# Altium PCB PCB1.PcbDoc
Units mil, origin at the board's own origin, x right, y up, seen from the top; angles counter-clockwise.
Board outline 1535 x 1515 mil, 2 copper layers (Top Layer, Bottom Layer); 34 components, 52 nets, 216 pads, 17 vias.
Unrouted connection lines stored in the file: 13.
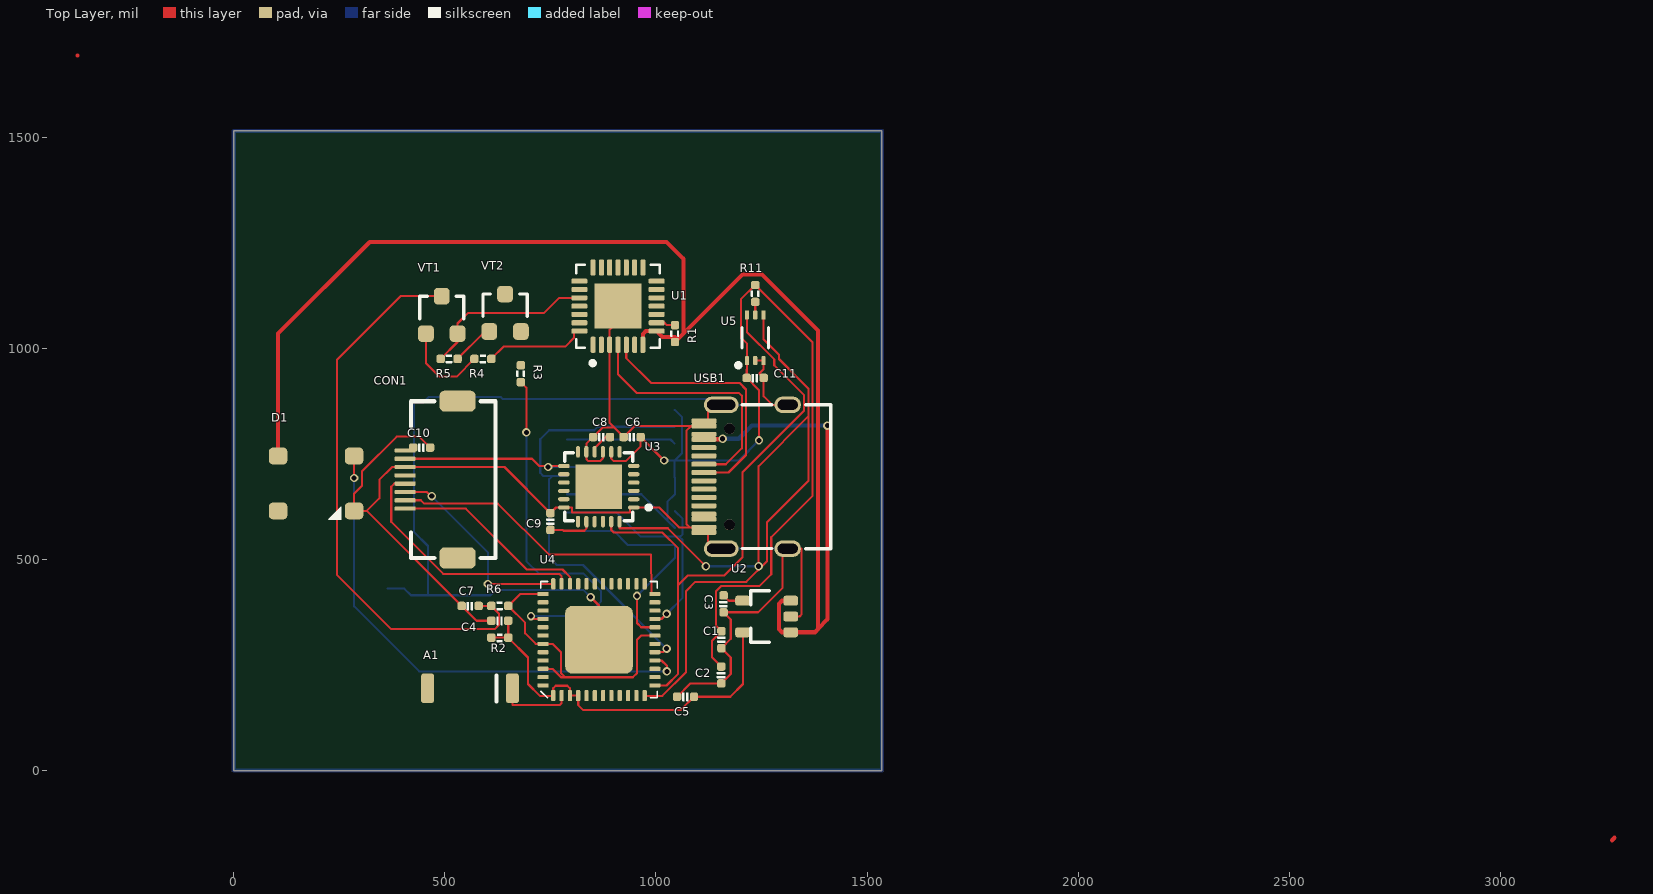
[diagram p0: Top Layer view]
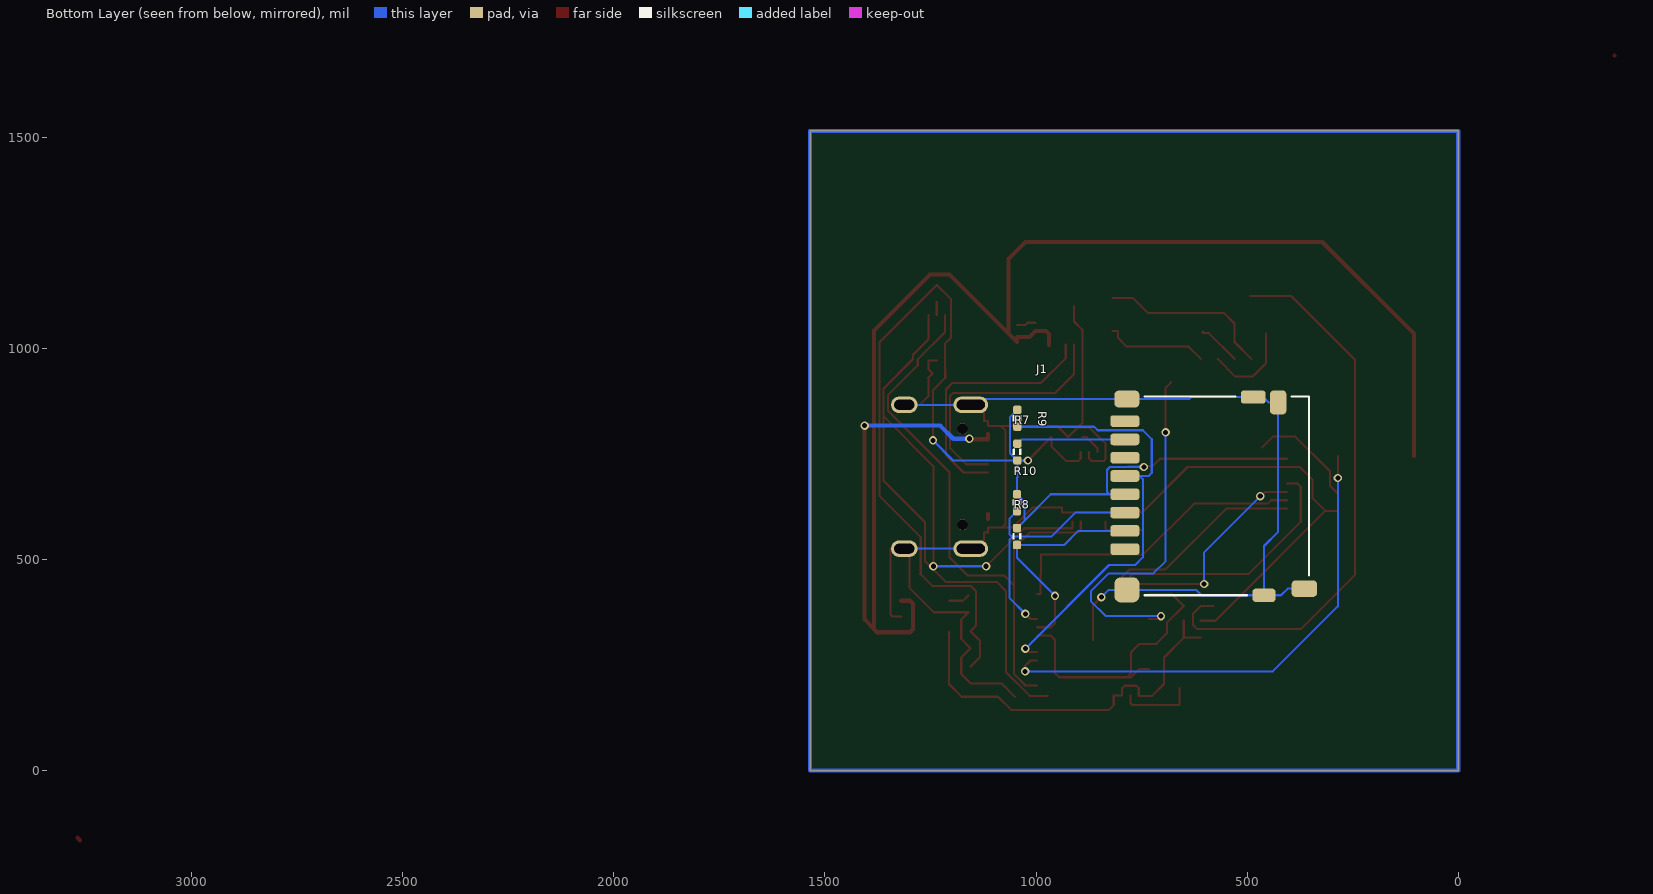
[diagram p1: Bottom Layer view, seen from below]
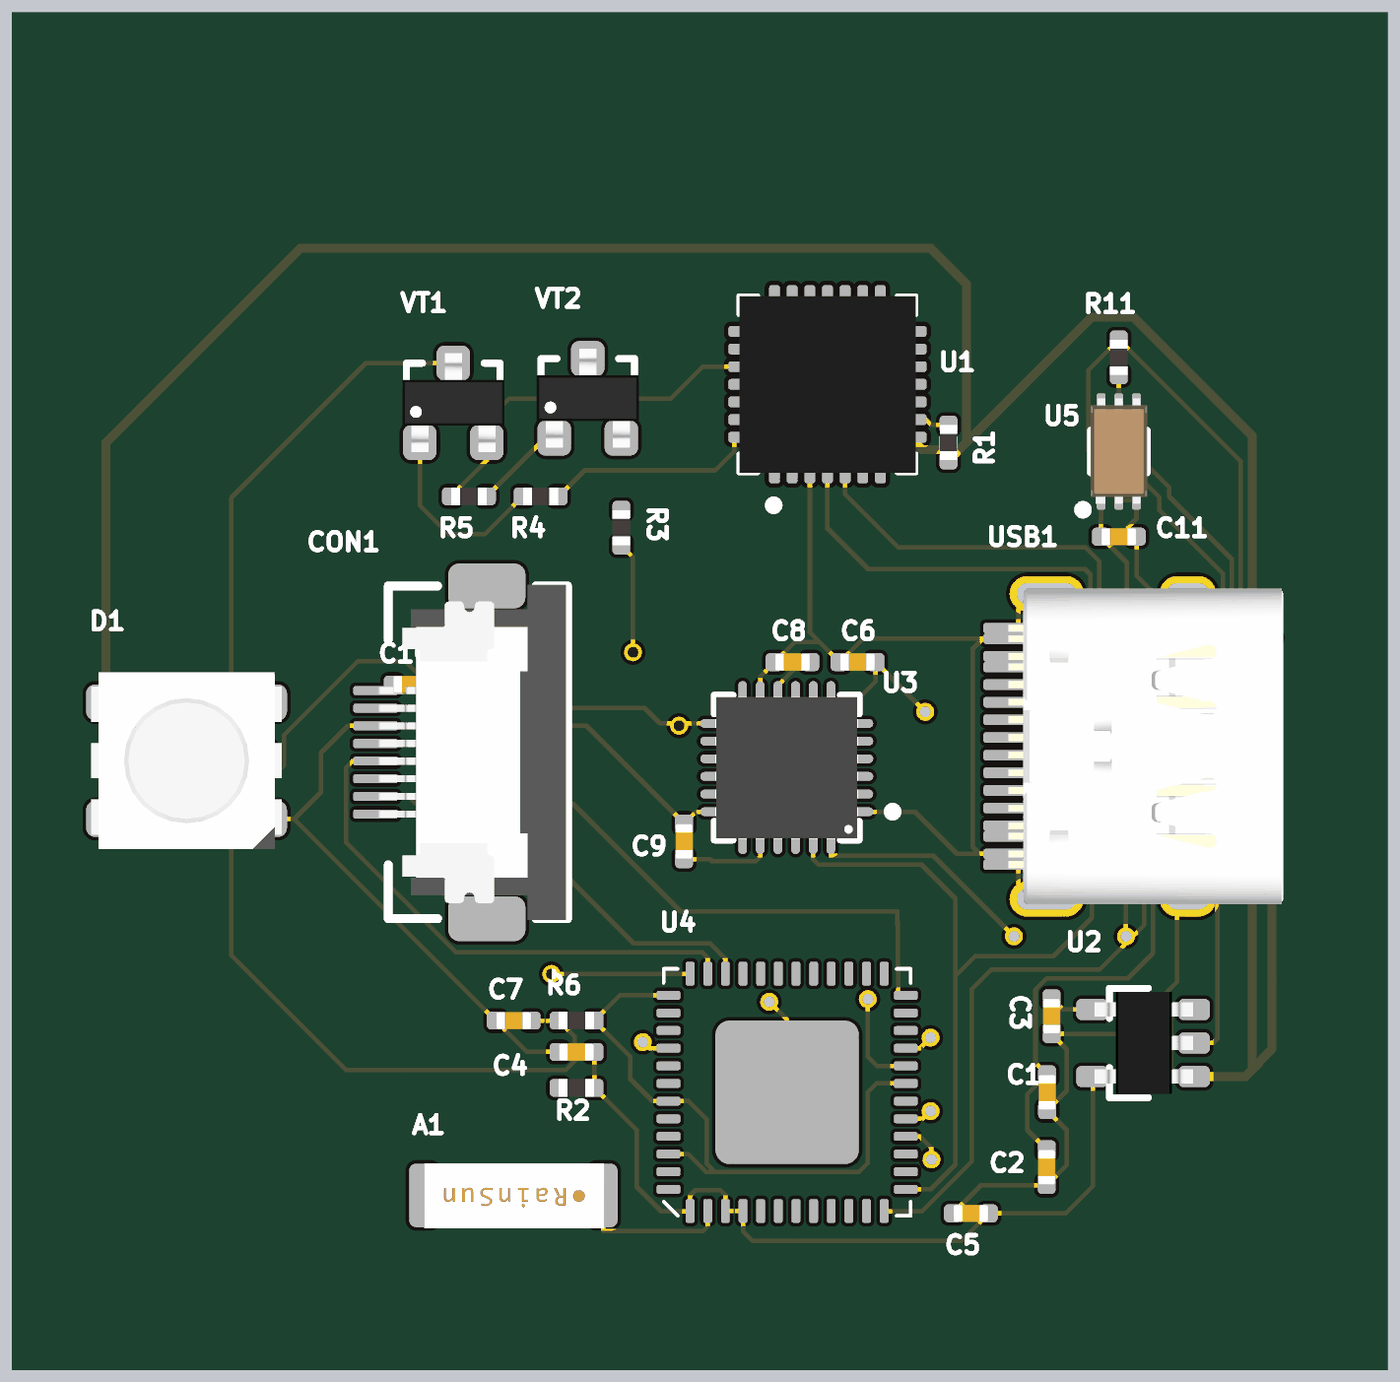
[diagram p2: 3D render of the assembled board from above, using the file's embedded part models]
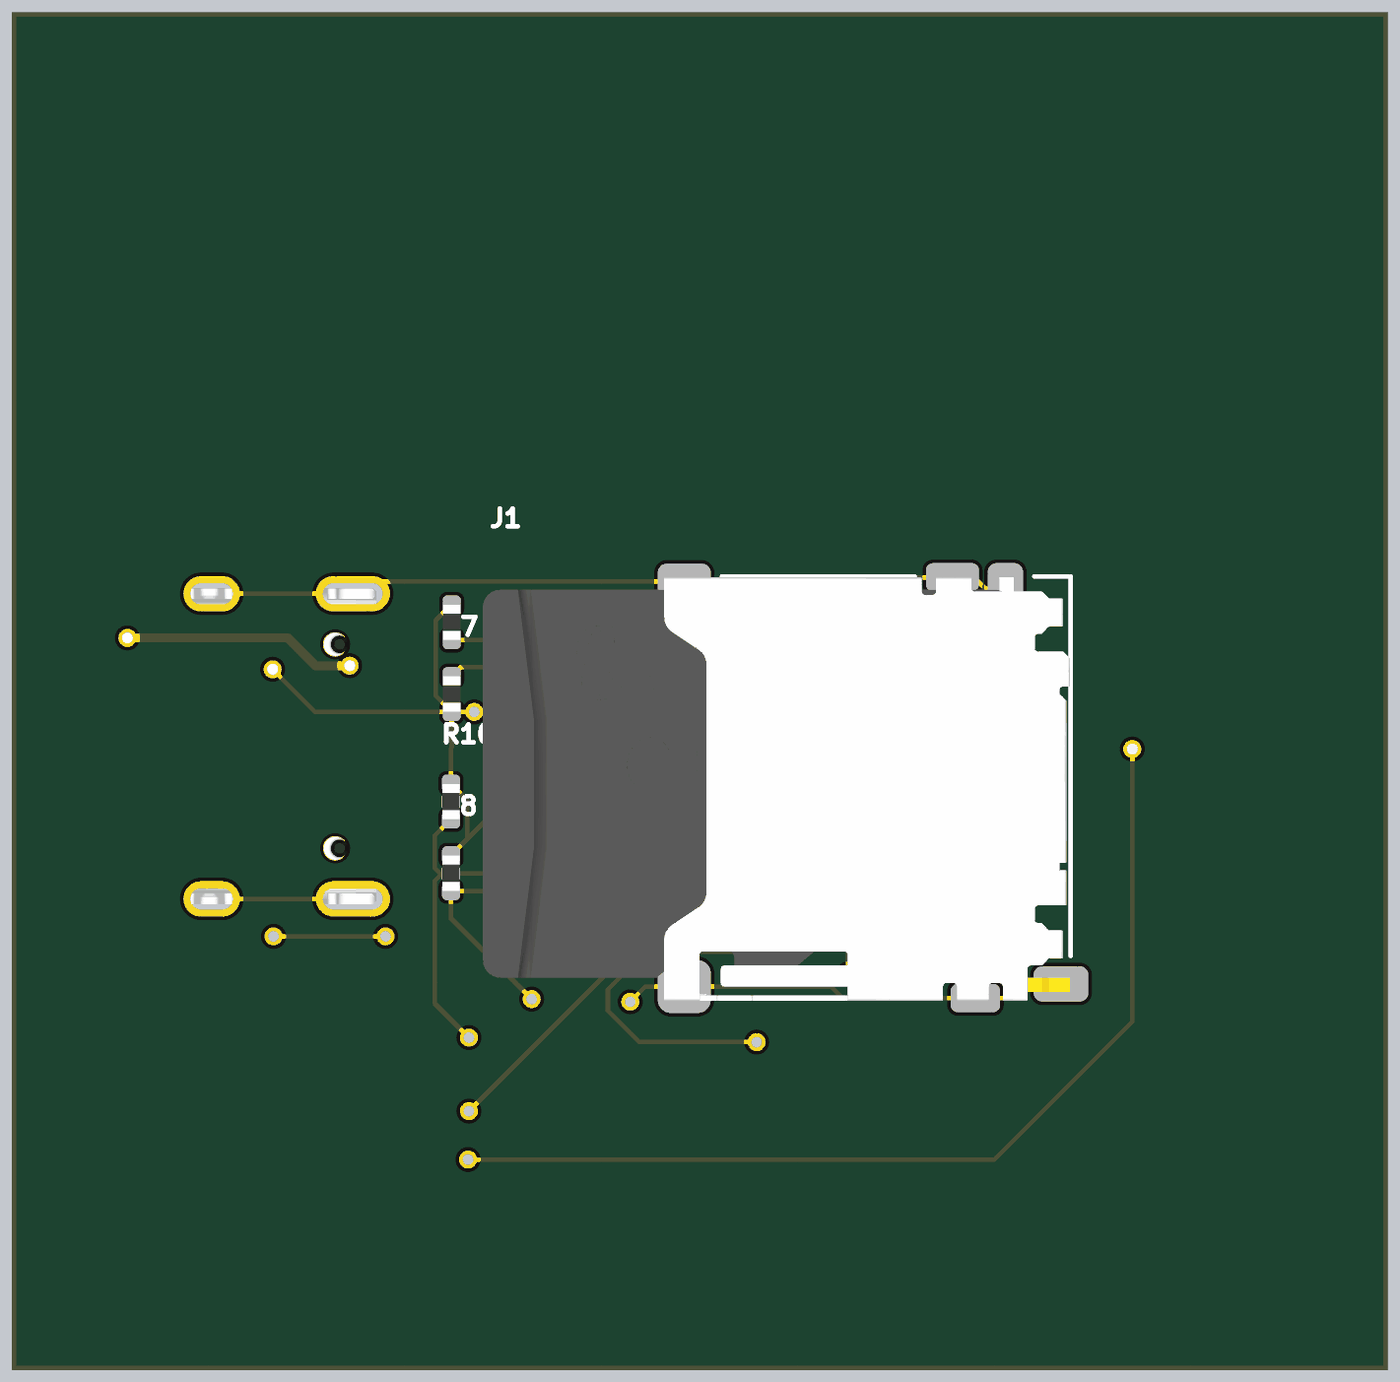
[diagram p3: 3D render of the assembled board from below, using the file's embedded part models]

## Layer stack, top to bottom
Top Solder: solder mask 0.4, Solder Resist, Dk 3.5
Top Layer: signal copper 1.4
Dielectric 1: dielectric 12.6, FR-4, Dk 4.8
Bottom Layer: signal copper 1.4
Bottom Solder: solder mask 0.4, Solder Resist, Dk 3.5

## Board outline
0,0 0,1515 1535,1515 1535,0

## Design rules (kind name [scope] priority, off if disabled: settings)
Clearance [All] p1: gap=5 ignorepadtopadclearanceinfootprint=FALSE
PolygonConnect [All] p1: connectstyle=Relief reliefconductorwidth=10 reliefentries=4 polygonreliefangle="90 Angle" airgapwidth=10
RoutingVias [All] p1: holewidth=12 width=20 viastyle="Through Hole" minholewidth=4 minwidth=12 maxholewidth=28 maxwidth=50
SolderMaskExpansion [All] p1: expansion=4 istentingtop=FALSE
Width Width_1 [InNet('VDD_5V')] p1: maxlimit=15 minlimit=10 preferedwidth=10
Width [All] p2: maxlimit=10 minlimit=5 preferedwidth=5
30 further rules are at their usual default settings.

## Components (designator, comment, footprint, x,y, rotation, side; value= is the part's Value field where it differs from the comment)
A1 "RAINSUN" ANT-Rainsun-AN5120 560,195 r180 top
C1 "0.1uF" CAP_0402 1155,310 r90 top value=0.1u
C2 "10uF" CAP_0402 1154.53,226.46 r90 top value=0.1u
C3 "10nF" CAP_0402 1160,395 r270 top value=0.1u
C4 "10uF" CAP_0402 630,355 r180 top value=0.1u
C5 "0.1uF" CAP_0402 1070,175 r180 top value=0.1u
C6 "10nF" CAP_0402 943.5,790 r180 top value=0.1u
C7 "0.1uF" CAP_0402 560,390 r180 top value=0.1u
C8 "0.1uF" CAP_0402 871,790 r0 top value=0.1u
C9 "2.2nF" CAP_0402 750,590 r90 top value=0.1u
C10 "0.1uF" CAP_0402 445,765 r0 top value=0.1u
C11 "0.1uF" CAP_0402 1235,930 r0 top value=0.1u
CON1 "FFC_0.5_8" FFC_0.5_8 495,689.37 r90 top
D1 "RGB" LED_5050_WS2812B 195,680 r0 top
J1 "TF-Socket" "TF-Card-Amphenol with TF" 789.71,654.37 r270 bottom
R1 "10K" RES_0402 1045,1035 r90 top value=22R
R2 "0R" RES_0402 630,315 r180 top value=22R
R3 "200R" RES_0402 680,940 r90 top value=22R
R4 "12K" RES_0402 590,975 r180 top value=22R
R5 "12K" RES_0402 510,975 r0 top value=22R
R6 "10K" RES_0402 630,390 r0 top value=22R
R7 "10K" RES_0402 1044.17,754.43 r270 bottom value=22R
R8 "10K" RES_0402 1045,554.43 r90 bottom value=22R
R9 "10K" RES_0402 1044.17,834.43 r90 bottom value=22R
R10 "10K" RES_0402 1045,634.43 r90 bottom value=22R
R11 "10k" RES_0402 1235,1130 r270 top value=22R
U1 "CP2102" QFN-28 910,1100 r90 top value=Value
U2 "LP2992 3V3" SOT23-5 1260,365 r180 top
U3 "MPU6050" QFN-24 864.53,672.32 r180 top
U4 "ESP32_SIP" QFN-48_7X7 865,310 r90 top
U5 "BH1750FVI-TR" BH1750FVI 1235,1025 r90 top
USB1 "Type-C" Type-C-TOP 1212.74,696.04 r0 top
VT1 "S8050" SMT_TRIODE_NPN 492.6,1079.29 r0 top
VT2 "S8050" SMT_TRIODE_NPN 642.6,1084.29 r0 top

## Footprints (in the part's own frame and the unit in brackets; to place one, negate y for a bottom-side part, rotate by r counter-clockwise, add the part's x,y. Pads: shape width x height; smd on the part's side, far side on the other; paste and mask are expansions set on the pad)
ANT-Rainsun-AN5120 [mm] "选择焊盘"
  rrect50% 0.8x1.8 smd: 1(-2.54,0) ""(2.563,0)
  silkscreen extent -1.57,-0.76 -1.57,0.79, body extent -2.57,-0.91 2.54,0.94, height 1.32
BH1750FVI [mm]
  rrect50% 0.55x0.25 smd paste+0 mask+0: 1(-1.375,0.5) 2(-1.375,0) 3(-1.375,-0.5) 4(1.375,-0.5) 5(1.375,0) 6(1.375,0.5)
  silkscreen extent -1.78,-0.8 0.6,1.14, body extent -1.49,-0.81 1.51,0.79, height 0.77
CAP_0402 [mil]
  rrect50% 20x20 smd: 1(-20,0) 2(20,0)
  silkscreen extent -7,-9 7,9, body extent -20,-10 20,10, height 20
FFC_0.5_8 [mil]
  rrect50% 50x86 smd: 0(-185.63,-35) 0(185.63,-35)
  rrect50% 10x50 smd: 1(-68.9,89) 2(-49.21,89) 3(-29.53,89) 4(-9.84,89) 5(9.84,89) 6(29.53,89) 7(49.21,89) 8(68.9,89)
  silkscreen extent -186,-125 186,75, body extent -187,-124 187,87, height 82
LED_5050_WS2812B [mil]
  rrect50% 44x40 smd: 1(-90,65) 2(-90,-65) 3(90,-65) 4(90,65)
  silkscreen extent 30,-85 60,-55, body extent -106,-98 106,98, height 69
QFN-24 [mm] "QFN, 24-Leads, Body 4.1x4.1mm (max), Pitch 0.50mm, IPC Low Density"
  oval 0.7x0.25 smd: 1(-2.1,1.25) 2(-2.1,0.75) 3(-2.1,0.25) 4(-2.1,-0.25) 5(-2.1,-0.75) 6(-2.1,-1.25) 13(2.1,-1.25) 14(2.1,-0.75) 15(2.1,-0.25) 16(2.1,0.25) 17(2.1,0.75) 18(2.1,1.25)
  oval 0.25x0.7 smd: 7(-1.25,-2.1) 8(-0.75,-2.1) 9(-0.25,-2.1) 10(0.25,-2.1) 11(0.75,-2.1) 12(1.25,-2.1) 19(1.25,2.1) 20(0.75,2.1) 21(0.25,2.1) 22(-0.25,2.1) 23(-0.75,2.1) 24(-1.25,2.1)
  rect 2.8x2.7 smd: ""(0,0)
  silkscreen extent -3.13,-2.05 2.05,2.05, body extent -2.02,-2.02 2.02,2.02, height 0.95
QFN-28 [mil]
  rrect50% 38x12 smd mask+5: 1(-91.5,59.05) 2(-91.5,39.37) 3(-91.5,19.68) 4(-91.5,0) 5(-91.5,-19.69) 6(-91.5,-39.37) 7(-91.5,-59.06) 15(91.5,-59.06) 16(91.5,-39.37) 17(91.5,-19.69) 18(91.5,0) 19(91.5,19.68) 20(91.5,39.37) 21(91.5,59.05)
  rrect50% 12x38 smd mask+5: 8(-59.05,-91.5) 9(-39.37,-91.5) 10(-19.68,-91.5) 11(0,-91.5) 12(19.69,-91.5) 13(39.37,-91.5) 14(59.06,-91.5) 22(59.06,91.5) 23(39.37,91.5) 24(19.69,91.5) 25(0,91.5) 26(-19.68,91.5) 27(-39.37,91.5) 28(-59.05,91.5)
  rect 106.3x110.24 smd: 29(0,0)
  silkscreen extent -140,-98 98,99, body extent -98,-98 98,98, height 35
QFN-48_7X7 [mm]
  rrect20% 4.064x4.064 smd: 0(0,0)
  rrect50% 0.675x0.25 smd: 1(-3.363,2.75) 2(-3.363,2.25) 3(-3.363,1.75) 4(-3.363,1.25) 5(-3.363,0.75) 6(-3.363,0.25) 7(-3.363,-0.25) 8(-3.363,-0.75) 9(-3.363,-1.25) 10(-3.363,-1.75) 11(-3.363,-2.25) 12(-3.363,-2.75) 25(3.363,-2.75) 26(3.363,-2.25) 27(3.363,-1.75) 28(3.363,-1.25) 29(3.363,-0.75) 30(3.363,-0.25) 31(3.363,0.25) 32(3.363,0.75) 33(3.363,1.25) 34(3.363,1.75) 35(3.363,2.25) 36(3.363,2.75)
  rrect50% 0.25x0.675 smd: 13(-2.75,-3.363) 14(-2.25,-3.363) 15(-1.75,-3.363) 16(-1.25,-3.363) 17(-0.75,-3.363) 18(-0.25,-3.363) 19(0.25,-3.363) 20(0.75,-3.363) 21(1.25,-3.363) 22(1.75,-3.363) 23(2.25,-3.363) 24(2.75,-3.363) 37(2.75,3.363) 38(2.25,3.363) 39(1.75,3.363) 40(1.25,3.363) 41(0.75,3.363) 42(0.25,3.363) 43(-0.25,3.363) 44(-0.75,3.363) 45(-1.25,3.363) 46(-1.75,3.363) 47(-2.25,3.363) 48(-2.75,3.363)
  silkscreen extent -3.5,-3.5 3.5,3.5, body extent -3.5,-3.5 3.5,3.5, height 1
RES_0402 [mil]
  rrect50% 20x20 smd: 1(-20,0) 2(20,0)
  silkscreen extent -7,-10 7,10, body extent -20,-10 20,10, height 14
SMT_TRIODE_NPN [mm] "Surface mount NPN transistor, package SOT-23"
  rrect50% 0.95x1 smd: 1(-0.95,-1.125) 2(0.95,-1.125) 3(0,1.125)
  silkscreen extent -1.33,-0.22 1.33,1.12, body extent -1.45,-1.4 1.45,1.4, height 1.3
SOT23-5 [mm] "SOT23, 3-Leads, Body 3.1x3.0mm (max), Pitch 0.95mm, IPC Medium Density"
  rrect50% 0.889x0.6 smd: 1(-1.5,0.95) 2(-1.5,0) 3(-1.5,-0.95) 4(1.396,-0.95) 5(1.396,0.95)
  silkscreen extent -0.2,-1.55 0.9,1.55, body extent -1.48,-1.45 1.32,1.45, height 1.2
"TF-Card-Amphenol with TF" [mm]
  rrect50% 0.7x1.75 smd: 1(3.3,0) 2(2.2,0) 3(1.1,0) 4(0,0) 5(-1.1,0) 6(-2.2,0) 7(-3.3,0) 8(-4.4,0)
  rrect50% 1x1.55 smd: 9(5.675,10.8)
  rrect50% 1.45x1 smd: 10(-5.525,9.225)
  rrect50% 1.5x1.5 smd: S1(5.75,0.125)
  rrect50% 1.016x1.5 smd: S2(-5.727,0.125)
  rrect50% 0.8x1.4 smd: S3(6.075,8.375)
  rrect50% 0.8x1.5 smd: S4(-5.85,7.725)
  silkscreen extent -5.88,1.2 6.07,11.08, body extent -5.85,-5.58 6.15,11.06, height 1.69
Type-C-TOP [mm]
  round 0.65 hole 0.65: 0(-0.98,-2.89) 0(-0.98,2.89)
  oval 1.6x1 hole 0.6 slot 1.2 at 0 deg: 1(2.52,4.325) 2(2.52,-4.325)
  oval 2.1x1 hole 0.6 slot 1.7 at 0 deg: 3(-1.48,-4.325) 4(-1.48,4.325)
  rrect50% 1.5x0.3 smd: A1(-2.52,-3.35) A4(-2.52,-2.55) A5(-2.52,-1.25) A6(-2.52,-0.25) A7(-2.52,0.25) A8(-2.52,1.25) A9(-2.52,2.55) A12(-2.52,3.35) B1(-2.52,3.05) B4(-2.52,2.25) B5(-2.52,1.75) B6(-2.52,0.75) B7(-2.52,-0.75) B8(-2.52,-1.75) B9(-2.52,-2.25) B12(-2.52,-3.05)
  silkscreen extent -0.22,-4.32 5.12,4.33, body extent -2.57,-4.48 5.18,4.48, height 3.26

## Part data
A1: library part ANT-Rainsun-AP5120
C1 C2 C3: library part 电容-0402_3, "Capacitor"
C4 C5 C7: library part 电容-0402_1, "Capacitor"
C6 C8 C9 C10 C11: library part 电容-0402, "Capacitor"
CON1: "FFC", System=Connector
D1: library part LED_5050_WS2812B, "LED", Type=5050
J1: "10 _8 + 2_ Position Card Connector Secure Digital - microSDâ„¢ Surface Mount, Right Angle Gold", Package=None, Availability=Unavailable, MF="Amphenol Commercial Products", MP=1140084168, Price=None, SnapEDA_Link=https://www.snapeda.com/parts/1140084168/Amphenol/view-part/4544529/?ref=snap
R1 R2 R3 R4 R5 R6: library part 电阻-0402_1, "Resistor"
R7 R8 R9 R10 R11: library part 电阻-0402, "Resistor"
U1: "USB转TTL", MFG #1="SILICON LABS", PART DESC="SINGLE-CHIP USB TO UART BRIDGE, QFN28, RoHS.", PART NUMBER=CP2102, RefDes=RefDes, Type=DEV
U2: library part LP2992, "LDO"
U3: "六轴传感器"
U4: library part ESP32-PICO
USB1: library part USB-Type-C-TOP
VT1 VT2: library part SMT_TRIODE_NPN, "Surface mount NPN transistor, package SOT-23"

## Via types
v1: diameter 20, hole 12, Top Layer to Bottom Layer, 17 vias

## Nets (pads, with @x,y where several pads share a name; then routed paths per layer and width w, separated by ;. In a path a pad name is that pad's centre, name@x,y a point inside that pad or via, vN(x,y) a via of type N, cw(c..) or ccw(c..) an arc to the next point about the centre after c; other vN are vias at no path point)
3V3: C1.2 C2.2 C4.1 C5.1 C6.1 C10.1 C11.1 CON1.7 J1.4 R2.1 R2.2 R7.2 R8.2 R9.2 R10.2 R11.1 U2.5 U3.8 U3.13 U4.1 U4.3 U4.4 U5.1 | length 4035.1
  Top Layer w5: CON1.7 706.42,738.58 723.46,721.54 v1@747,721.54 ; R2.2 R2.1 ; C4.1 R2.1 ; v1(744.46,719) v1@747,721.54 ; U3.13 v1@747,721.54 ; U3.8 894.06,738.94 900,733 928,733 963.5,768.5 C6.1 v1(1019.07,734.43) ; C2.2 1133,267.99 1133,308 C1.2 1142,343 1142,425 1154,437 1244.96,437 1272.96,465 1272.96,552.95 1371,650.99 1371,1014 R11.1 1201.16,1116.16 1201.16,1025.84 1215.32,1011.68 U5.1 1215.32,950.32 1215,950 C11.1 1244,901 v1(1244,782) ; U2.5 1206,327.6 1206,205 1176,175 C5.1 1059,144 826.79,144 815.79,155 U4.4 U4.3 796.1,195 790.1,201 762.73,201 756.73,195 U4.1 756.73,177 725,177 697,205 697,268 R2.1
  Bottom Layer w5: v1(744.46,719) 825,719 832,712 832,660 826.37,654.37 ; J1.4 826.37,654.37 ; v1(1019.07,734.43) R7.2 ; R9.2 1062,836.61 1062,752.26 R7.2 ; R8.2 1027,592.43 ; v1(1244,782) 1196.43,734.43 R7.2 ; 826.37,654.37 965.06,654.37 1027,592.43 ; 1027,592.43 1027,636.43 R10.2 1045,694 1044.17,694.83 R7.2
3V3A: R6.2 U4.19 U4.37 U4.43 U4.46 | length 703.1
  Top Layer w5: U4.46 755,241.1 775.1,221 785,221 ; U4.37 678.27,418.27 R6.2 690,350 690,325 714.84,300.16 U4.43 755,300.16 775,280.16 775,231 785,221 ; U4.19 964.84,319.84 955,310 955,231 945,221 785,221
BH_SCL: U3.23 U4.13 U5.6 | length 1430.3
  Top Layer w5: U3.23 894.06,569.94 900,564 1015,564 1052.5,526.5 1052.5,439.5 ; U4.13 1025,201.73 1052.5,229.23 1052.5,439.5 ; U5.6 1215.32,1038.68 1280,974 1280,960 1350.95,889.05 1350.95,852.95 1205,707 1205,505 1162,462 1075,462 1052.5,439.5
BH_SDA: U3.24 U4.12 U5.4 | length 1988.8
  Top Layer w5: U3.24 913.74,574 1028,574 v1(1118,484) ; U4.12 973.27,177 1015,177 1071,233 1071,425 1093,447 1214,447 1262.96,495.96 1262.96,587.96 1360.95,685.95 1360.95,839.08 ; v1(1243,484) 1243,721.13 1360.95,839.08 ; U5.4 1254.69,1021.67 1291.33,985.02 1291.33,974.67 1360.95,905.05 1360.95,839.08
  Bottom Layer w5: v1(1118,484) v1(1243,484)
CP_Rx: U1.25 U4.41
CP_Tx: R3.1 U4.40 | length 871.7
  Top Layer w5: R3.1 693,907 v1(693,801) ; v1(704,366) 710.79,359.21 U4.40
  Bottom Layer w5: v1(693,801) 693,496 722,467 828,467 870,425 870,401 835,366 v1(704,366)
DC: CON1.5 U4.22
DTR: R4.1 U1.28 | length 245.2
  Top Layer w5: R4.1 639,1004 785,1004 806,1025 806,1040.95 U1.28
EN: C7.1 R6.1 U4.9 VT1.3 | length 1342.9
  Top Layer w5: VT1.3 395,1123.58 245,973.58 245,463 373,335 618,335 628,345 628,372 R6.1 C7.1
FLASH_CLK: U4.31
FLASH_CS: U4.25
FLASH_SD0: U4.27
FLASH_SD1: U4.33
FLASH_SD2: U4.30
FLASH_SD3: U4.32
GND: C1.1 C2.1 C3.2 C4.2 C5.2 C6.2 C7.2 C8.1 C9.2 C10.2 C11.2 CON1.6 D1.3 J1.6 J1.9 J1.10 J1.S1 J1.S2 J1.S3 J1.S4 U1.3 U1.29 U2.2 U3.1 U3.9 U3.11 U3.18 U4.0 U5.2 U5.3 USB1.1 USB1.2 USB1.3 USB1.4 USB1.A1 USB1.A12 USB1.B1 USB1.B12 | length 5969.6
  Top Layer w5: C10.2 439,791 386,791 303.76,708.76 303.76,675 285,656.24 D1.3 315,615 ; C4.2 575,355 C7.2 315,615 ; v1(845,411) 865,391 U4.0 ; U3.9 874.37,740 867.37,733 840,733 835,738 U3.11 835,774 C8.1 873.5,812.5 901,812.5 ; U1.29 910,1063.68 890.32,1044 U1.3 890.32,823.18 901,812.5 ; C5.2 1081.46,206.46 C2.1 1177,228.93 1177,268 C1.1 1177,312 1177,358 C3.2 1242,375 1300,433 1300,525.76 USB1.2 1345,525.76 1345,370 1340,365 U2.2 ; USB1.3 1123,525.76 1123,564.15 USB1.A1 USB1.B12 1080,575.96 ; USB1.4 1123,866.32 1123,827.93 USB1.A12 USB1.B1 1083.12,816.12 ; U5.2 U5.3 1254.69,950.31 1244.69,940.31 C11.2 1255,886.32 1275,866.32 USB1.1 ; 315,615 345,645 345,688.9 375,718.9 CON1.6 641.1,718.9 C9.2 763.11,623.11 U3.18 801,623.11 801,611 938,611 938,623.11 U3.1 1007.49,623.11 1054.64,575.96 1080,575.96 ; 901,812.5 C6.2 949.62,816.12 1083.12,816.12 ; 1080,575.96 1072,583.96 1072,805 1083.12,816.12
  Bottom Layer w5: J1.9 404,430.95 419.75,415.2 J1.S3 ; v1(845,411) 828.01,427.99 J1.S1 620.96,427.99 608.16,415.2 J1.S3 ; USB1.3 USB1.2 ; USB1.1 USB1.4 1133,866.32 1133,880 833.16,880 833,879.84 J1.S2 636.84,879.84 632,884.69 J1.S4 461.8,884.69 449,871.89 J1.10 426.52,565.48 460,532 J1.S3
GPIO0: U4.23 VT2.3
GPIO4: CON1.2 U4.24 | length 737.2
  Top Layer w5: CON1.2 443.12,640.16 450.86,632.41 625.68,632.41 746.09,512 988,512 989,418.27 U4.24
GPIO5: CON1.1 U4.34 | length 473.5
  Top Layer w5: CON1.1 549.53,620.47 693.64,476.36 778.64,476.36 796.1,458.9 U4.34
GPIO9: U4.28
GPIO10: U4.29
GPIO12: U4.18
GPIO13: J1.2 R8.1 U4.20 | length 537.8
  Top Layer w5: v1(955,414) 955,349.53 965,339.53 U4.20
  Bottom Layer w5: J1.2 900,567.76 933.32,534.43 R8.1 1045,504 v1(955,414)
GPIO14: J1.5 R9.1 U4.17 | length 1071.6
  Top Layer w5: U4.17 1016.47,280.47 v1(1025,289)
  Bottom Layer w5: J1.5 754.68,697.68 ; v1(1025,289) 827,487 765,487 747,505 747,690 754.68,697.68 ; R9.1 862.43,814.43 854,806 747,806 726,785 726,705 733.32,697.68 754.68,697.68
GPIO15: J1.3 R10.1 U4.21 | length 595.9
  Top Layer w5: U4.21 1013.21,359.21 v1(1025,371)
  Bottom Layer w5: J1.3 906.94,611.06 964,554 1055,554 ; v1(1025,371) 1063,409 1063,546 1055,554 ; R10.1 1063,596.43 1063,560 1057,554 1055,554
GPIO18: CON1.4 U4.35 | length 593.9
  Top Layer w5: CON1.4 380,679.53 373,672.53 373,589 496,466 770.42,466 776.42,460 U4.35
GPIO19: U4.38
GPIO21: U4.42
GPIO22: U4.39
GPIO23: CON1.3 U4.36 | length 485.3
  Top Layer w5: CON1.3 457,659.84 466.84,650 v1(469,650) ; v1(602,442) 756.73,442 U4.36
  Bottom Layer w5: v1(469,650) 602,517 v1(602,442)
GPIO25: U4.14
GPIO26: J1.7 R7.1 U4.15 | length 258.5
  Bottom Layer w5: J1.7 1034.31,784.29 R7.1
GPIO27: D1.4 U4.16 | length 1207.7
  Top Layer w5: v1(285,693) D1.4 ; U4.16 1013.21,260.79 1026,248 v1(1026,235)
  Bottom Layer w5: v1(285,693) 285,389 439,235 v1(1026,235)
GPIO34: U4.10
GPIO35: U4.11
GPIO37: U4.6
GPIO38: U4.7
NetA1_1: A1.1 U4.2 | length 176.1
  Top Layer w5: A1.1 660,155 771.42,155 776.42,160 U4.2
NetC3_1: C3.1 U2.4 | length 50.3
  Top Layer w5: C3.1 1172.6,402.4 U2.4
NetC8_2: C8.2 U3.10 | length 56.1
  Top Layer w5: U3.10 854.69,764 880.69,790 C8.2
NetC9_1: C9.1 U3.20 | length 104.5
  Top Layer w5: C9.1 779,570 781,568 830,568 835,573 U3.20
NetR1_2: R1.2 U1.9 | length 45.8
  Top Layer w5: U1.9 1020,1060.63 1025.63,1055 R1.2
NetR3_2: R3.2 U1.26
NetR4_2: R4.2 VT1.1 | length 215.5
  Top Layer w5: VT1.1 455.2,965 487.2,933 528,933 R4.2
NetR5_2: R5.2 VT2.1 | length 104.5
  Top Layer w5: R5.2 591,1036 605.2,1036 VT2.1
NetR11_2: R11.2 U5.5 | length 30.9
  Top Layer w5: U5.5 R11.2
RTS: R5.1 U1.24 VT1.2 | length 414.2
  Top Layer w5: R5.1 530,1015 VT1.2 530,1059 555,1084 735,1084 770.69,1119.69 U1.24
SENSOR_VN: U4.8
SENSOR_VP: U4.5
USB-PWR-DM: U1.5 USB1.A7 USB1.B7 | length 618.2
  Top Layer w5: U1.5 929.69,977 988.69,918 1198,918 1213.31,902.69 1213.31,747.31 1171.88,705.88 USB1.A7
USB-PWR-DP: U1.4 USB1.A6 USB1.B6 | length 613.9
  Top Layer w5: U1.4 910,939 955,894 1197,894 1203.31,887.69 1203.31,763.31 1165.57,725.57 USB1.B6
VDD_5V: CON1.8 D1.1 R1.1 U1.7 U1.8 U2.1 U2.3 USB1.A4 USB1.A9 USB1.B4 USB1.B9 | length 3843.8
  Top Layer w10: D1.1 105,1035 322,1252 1025,1252 1065,1212 1065,1035 ; U1.7 969.06,1034 976,1040.95 U1.8 1015.45,1027 1045,1027 R1.1 1065,1035 ; USB1.A4 USB1.B9 ; USB1.A9 USB1.B4 1156.62,784.62 v1(1158,786) ; U2.3 1298.4,402.4 1291,395 1291,335 1298.4,327.6 U2.1 1376.6,327.6 ; v1(1406,817) 1406,358.6 1384,335.4 ; 1065,1035 1205,1175 1251,1175 1384,1042 1384,335.4 ; 1376.6,327.6 1384,335.4 ; 1376.6,327.6 1384,335 1384,335.4
  Bottom Layer w10: v1(1158,786) 1196,786 1227,817 v1(1406,817)
pads on no net: A1. CON1.0 D1.2 J1.1 J1.8 U1.1 U1.2 U1.6 U1.10 U1.11 U1.12 U1.13 U1.14 U1.15 U1.16 U1.17 U1.18 U1.19 U1.20 U1.21 U1.22 U1.23 U1.27 U3. U3.2 U3.3 U3.4 U3.5 U3.6 U3.7 U3.12 U3.14 U3.15 U3.16 U3.17 U3.19 U3.21 U3.22 U4.26 U4.44 U4.45 U4.47 U4.48 USB1.0 USB1.A5 USB1.A8 USB1.B5 USB1.B8 VT2.2
copper on no net: | length 6108.3
  Top Layer w10: 3264.14,-165 3270,-159.14
  Bottom Layer w10: 0,0 1535,0 1535,1515 0,1515 0,0